# Altium PCB STM32.PcbDoc
Units mm, origin at the board's own origin, x right, y up, seen from the top; angles counter-clockwise.
Board outline 56 x 45 mm, 2 copper layers (Top Layer, Bottom Layer); 41 components, 49 nets, 211 pads, 72 vias.
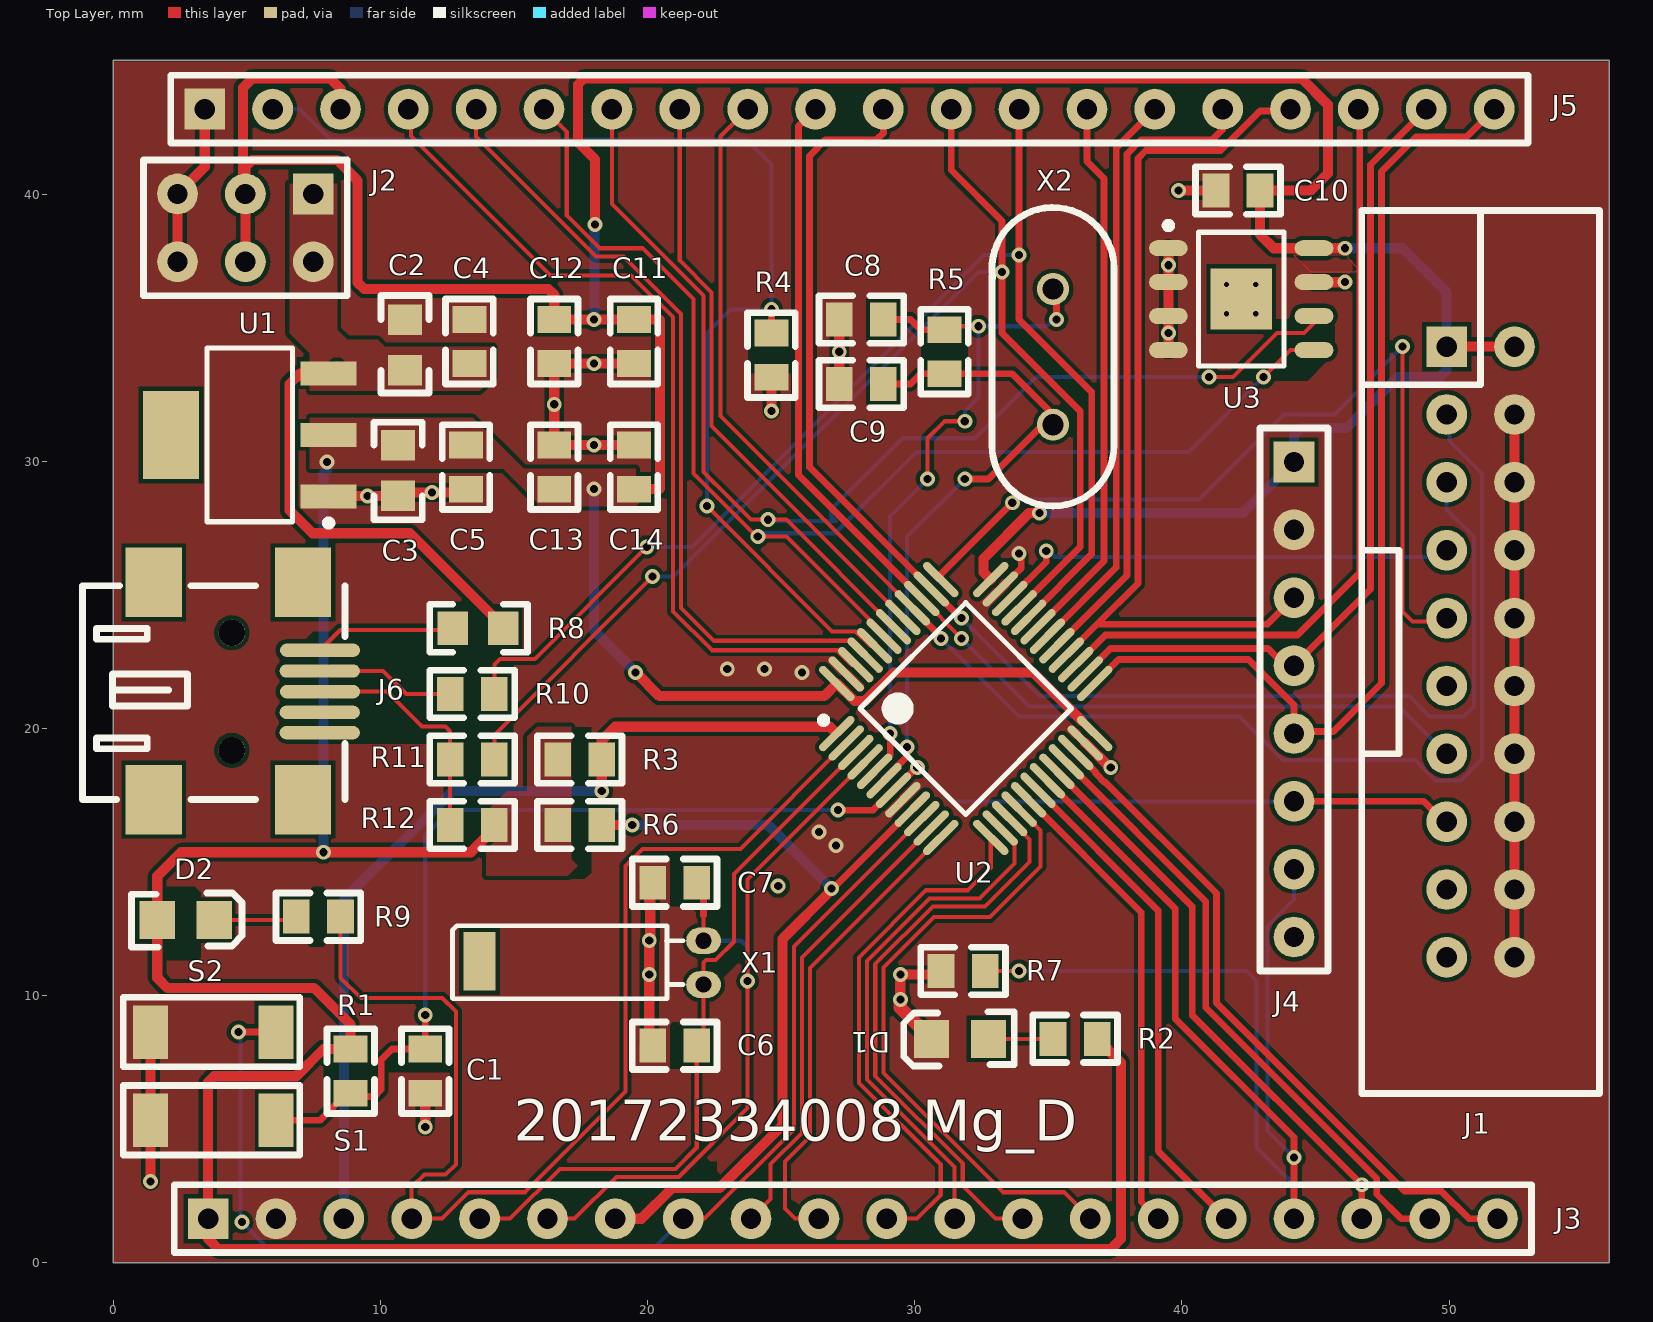
[diagram p0: Top Layer view]
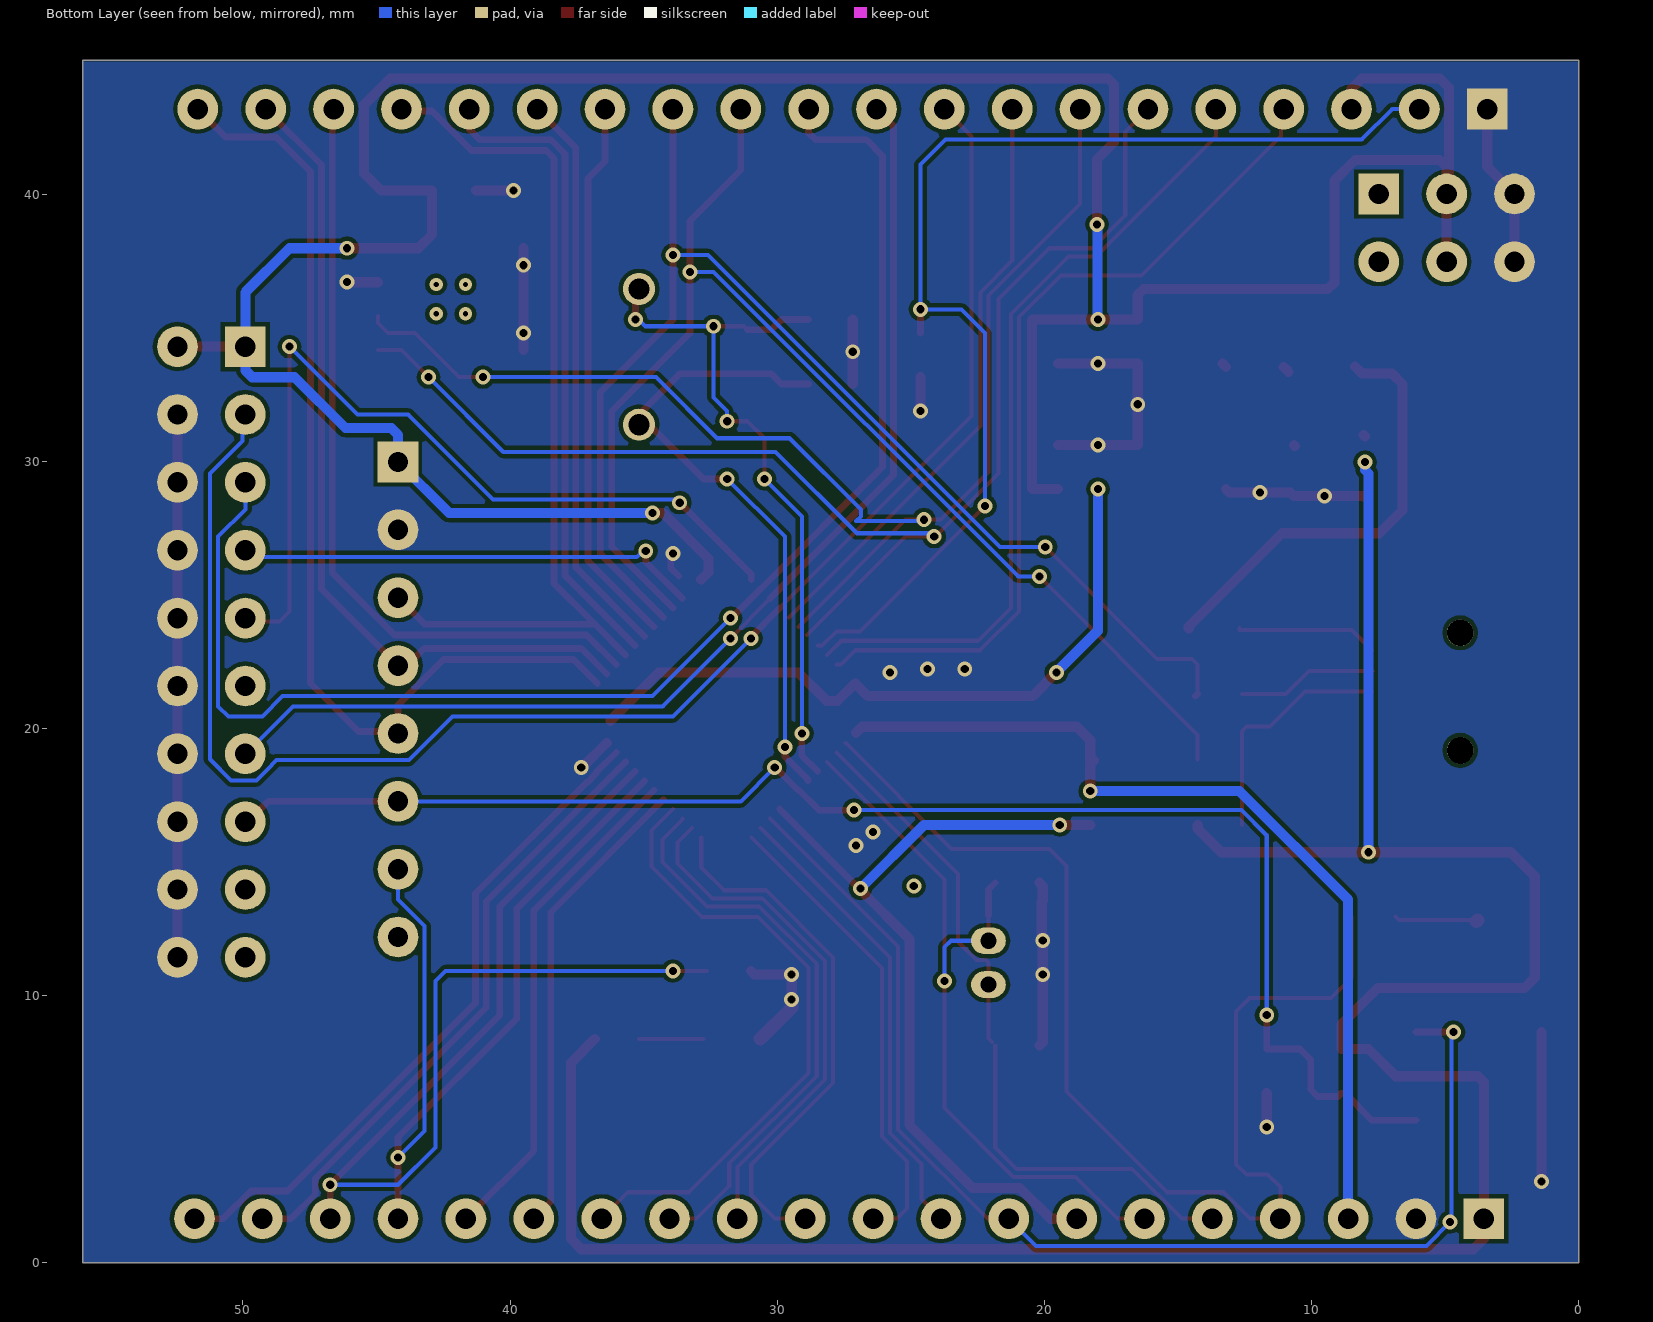
[diagram p1: Bottom Layer view, seen from below]

## Layer stack, top to bottom
Top Solder: solder mask 0.0102, Solder Resist, Dk 3.5
Top Layer: signal copper 0.0356
Dielectric 1: dielectric 0.32, FR-4, Dk 4.8
Bottom Layer: signal copper 0.0356
Bottom Solder: solder mask 0.0102, Solder Resist, Dk 3.5

## Board outline
0,0 0,45 56,45 56,0

## Design rules (kind name [scope] priority, off if disabled: settings)
Clearance [All] p1: gap=0.152 ignorepadtopadclearanceinfootprint=FALSE
PlaneConnect [All] p1: planeconnectstyle=Direct reliefexpansion=0.508 reliefentries=4 reliefconductorwidth=0.254 reliefairgap=0.254
PolygonConnect [All] p1: connectstyle=Direct reliefconductorwidth=0.254 reliefentries=4 polygonreliefangle="90 Angle" airgapwidth=0.254
RoutingVias [All] p1: holewidth=0.305 width=0.559 viastyle="Through Hole" minholewidth=0.305 minwidth=0.559 maxholewidth=0.305 maxwidth=0.559
SolderMaskExpansion [All] p1: expansion=0.102
Width PWR [InNetClass('PWR')] p1: maxlimit=0.381 minlimit=0.381 preferedwidth=0.381
Width Width_1 [All] p2: maxlimit=0.152 minlimit=0.152 preferedwidth=0.152
29 further rules are at their usual default settings.

## Classes and differential pairs
net class GND: GND
net class PWR: 3V3 5V GND VBAT VDDA

## Components (designator, comment, footprint, x,y, rotation, side; value= is the part's Value field where it differs from the comment)
C1 "104" RC0603 11.684,6.35 r90 top locked
C2 "10uf" 0805 10.922,34.351 r90 top locked
C3 "10uf" 0805 10.668,29.657 r270 top locked
C4 "104" RC0603 13.335,33.655 r90 top locked
C5 "104" RC0603 13.208,30.607 r270 top locked
C6 "15P" RC0603 20.193,8.128 r0 top locked
C7 "15P" RC0603 20.193,14.224 r0 top locked
C8 "22pF" RC0603 27.178,35.306 r0 top locked
C9 "22pF" RC0603 27.178,32.893 r0 top locked
C10 "104" RC0603 42.926,40.132 r180 top locked
C11 "104" RC0603 19.494,35.306 r270 top locked
C12 "104" RC0603 16.51,35.306 r270 top locked
C13 "104" RC0603 16.51,28.956 r90 top locked
C14 "104" RC0603 19.494,28.956 r90 top locked
D1 "LED0" LED0805#1 32.766,8.382 r0 top locked
D2 "LED0" LED0805#2 1.651,12.827 r180 top locked
J1 "Header 10X2" JTAG_20P 51.181,22.86 r270 top locked
J2 "Header 3X2" H-3X2 7.492,40.005 r180 top locked
J3 "Header 20" "H 20" 27.686,1.651 r0 top locked
J4 "TFT" H-8 44.196,21.082 r270 top locked
J5 "Header 20" "H 20" 27.559,43.18 r0 top locked
J6 "Mini-USB" mini_USB 7.744,22.926 r90 top locked
R1 "10K" RC0603 8.89,6.35 r90 top locked
R2 "510R" RC0603 36.83,8.382 r180 top locked
R3 "0R" RC0603 16.637,18.835 r0 top locked
R4 "10K" RC0603 24.638,34.798 r270 top locked
R5 "1M" RC0603 31.115,34.925 r270 top locked
R6 "0R" RC0603 16.637,16.383 r0 top locked
R7 "10K" RC0603 32.639,10.922 r180 top locked
R8 "500mA" 0805 13.655,23.749 r0 top locked
R9 "510R" RC0603 6.858,12.954 r0 top locked
R10 "22R" RC0603 12.617,21.286 r0 top locked
R11 "22R" RC0603 12.617,18.835 r0 top locked
R12 "1.5K" RC0603 12.617,16.383 r0 top locked
S1 "SW-SPST" SMT-KEY 6.097,5.334 r90 top locked
S2 "SW-SPST" SMT-KEY 6.096,8.636 r90 top locked
U1 "AMS1117-3.3" SOT223 5.117,30.988 r180 top locked
U2 "STM32F103C8T6" LQFP48 27.085,19.809 r315 top locked
U3 "AT24C04" SOIC-8 42.222,36.068 r0 top locked
X1 "32.768K" JZ32768 22.098,10.414 r90 top locked
X2 "8M" JZ49S 35.179,36.449 r90 top locked

## Footprints (in the part's own frame and the unit in brackets; to place one, negate y for a bottom-side part, rotate by r counter-clockwise, add the part's x,y. Pads: shape width x height; smd on the part's side, far side on the other; paste and mask are expansions set on the pad)
0805 [mm]
  rect 1.14x1.27 smd: 1(-0.95,0) 2(0.95,0)
  silkscreen extent -1.8,-0.9 1.85,0.9
"H 20" [mil]
  rect 60x60 hole 30: 1(-950,0)
  round 60 hole 30: 2(-850,0) 3(-750,0) 4(-650,0) 5(-550,0) 6(-450,0) 7(-350,0) 8(-250,0) 9(-150,0) 10(-50,0) 11(50,0) 12(150,0) 13(250,0) 14(350,0) 15(450,0) 16(550,0) 17(650,0) 18(750,0) 19(850,0) 20(950,0)
  silkscreen extent -1000,-50 1000,50
H-3X2 [mil]
  rect 60x60 hole 30: 1(0,0)
  round 60 hole 30: 2(0,100) 3(100,0) 4(100,100) 5(200,0) 6(200,100)
  silkscreen extent -50,-50 250,150
H-8 [mil]
  rect 60x60 hole 30: 1(-350,0)
  round 60 hole 30: 2(-250,0) 3(-150,0) 4(-50,0) 5(50,0) 6(150,0) 7(250,0) 8(350,0)
  silkscreen extent -400,-50 400,50
JTAG_20P [mil]
  rect 60x60 hole 30: 1(-450,-50)
  round 60 hole 30: 2(-450,50) 3(-350,-50) 4(-350,50) 5(-250,-50) 6(-250,50) 7(-150,-50) 8(-150,50) 9(-50,-50) 10(-50,50) 11(50,-50) 12(50,50) 13(150,-50) 14(150,50) 15(250,-50) 16(250,50) 17(350,-50) 18(350,50) 19(450,-50) 20(450,50)
  silkscreen extent -651,-175 651,175
JZ49S [mm]
  round 1.2 hole 0.8: 1(0,0) 2(-5.08,0)
  silkscreen extent -8.13,-2.29 3.05,2.29
JZ32768 [mm]
  oval 1x1.3 hole 0.6: 1(0,0) 2(1.64,0)
  rect 2.2x1.2 smd: 3(0.875,8.382)
  silkscreen extent -0.53,0.76 2.2,9.4
LED0805#1 [mil]
  rect 52x56 smd: 1(0,0) 2(-84,0)
  silkscreen extent -125,-40 38,40
LED0805#2 [mil]
  rect 52x56 smd: 1(0,0) 2(-84,0)
  Top Layer lines w20: -84,0 -86,2
  silkscreen extent -125,-40 38,40
LQFP48 [mm]
  oval 0.3x1.75 smd: 1(0,0) 2(0.5,0) 3(1,0) 4(1.5,0) 5(2,0) 6(2.5,0) 7(3,0) 8(3.5,0) 9(4,0) 10(4.5,0) 11(5,0) 12(5.5,0) 25(5.5,8.15) 26(5,8.15) 27(4.5,8.15) 28(4,8.15) 29(3.5,8.15) 30(3,8.15) 31(2.5,8.15) 32(2,8.15) 33(1.5,8.15) 34(1,8.15) 35(0.5,8.15) 36(0,8.15)
  oval 1.75x0.3 smd: 13(6.825,1.325) 14(6.825,1.825) 15(6.825,2.325) 16(6.825,2.825) 17(6.825,3.325) 18(6.825,3.825) 19(6.825,4.325) 20(6.825,4.825) 21(6.825,5.325) 22(6.825,5.825) 23(6.825,6.325) 24(6.825,6.825) 37(-1.325,6.825) 38(-1.325,6.325) 39(-1.325,5.825) 40(-1.325,5.325) 41(-1.325,4.825) 42(-1.325,4.325) 43(-1.325,3.825) 44(-1.325,3.325) 45(-1.325,2.825) 46(-1.325,2.325) 47(-1.325,1.825) 48(-1.325,1.325)
  silkscreen extent -0.82,-0.12 5.55,6.88
mini_USB [mm]
  oval 0.5x3 smd: 1(0,0) 2(-0.775,0.009) 3(-1.549,0) 4(-2.324,0.009) 5(-3.086,0.009)
  rect 2.6x2.1 smd: ""(-5.588,6.223) ""(-5.588,0.635) ""(2.54,6.223) ""(2.54,0.635)
  round 1 hole 1: ""(-3.749,3.299) ""(0.651,3.299)
  silkscreen extent -5.59,-0.94 2.41,8.89
RC0603 [mm]
  rect 1x1.27 smd: 1(0,0) 2(1.651,0)
  silkscreen extent -0.76,-0.89 2.41,0.89
SMT-KEY [mm]
  rect 2x1.3 smd paste+0 mask+0.2: 1(0,0) 2(0,4.7)
  silkscreen extent -1.3,-0.89 1.3,5.72
SOIC-8 [mm] "SOIC, 8-Leads, Body 4.90x3.90mm, Pitch 1.27mm, Thermal Pad 2.29x2.29mm, IPC Medium Density"
  oval 1.45x0.6 smd: 1(-2.725,1.905) 2(-2.725,0.635) 3(-2.725,-0.635) 4(-2.725,-1.905) 5(2.725,-1.905) 6(2.725,-0.635) 7(2.725,0.635) 8(2.725,1.905)
  rect 2.29x2.29 smd: 9(0,0)
  silkscreen extent -2.85,-2.5 1.6,2.88, body extent -2,-2.5 2,2.5, height 1.75
SOT223 [mm] "SOT223, 4-Leads, Body 6.20x7.00mm (avg), Pitch 2.30mm, IPC Medium Density"
  rect 2.1x0.9 smd: 1(-2.95,2.3) 2(-2.95,0) 3(-2.95,-2.3)
  rect 2.1x3.3 smd: 4(2.95,0)
  silkscreen extent -3.08,-3.25 1.6,3.42, body extent -1.9,-3.25 1.9,3.25, height 1.8

## Part data
C1 C4 C5 C6 C7 C8 C9 C10 C11 C12 C13 C14: library part CAP, "电容"
C2 C3: library part CAP+, "极性电容"
D1 D2: "LED"
R1 R2 R3 R4 R5 R6 R7 R8 R9 R10 R11 R12: library part RES, "电阻"
S1 S2: "开关"
U1 U2 U3: "IC"

## Via types
v1: diameter 0.559, hole 0.305, Top Layer to Bottom Layer, tented both sides, 68 vias
v2: diameter 0.5, hole 0.2, Top Layer to Bottom Layer, 4 vias

## Nets (pads, with @x,y where several pads share a name; then routed paths per layer and width w, separated by ;. In a path a pad name is that pad's centre, name@x,y a point inside that pad or via, vN(x,y) a via of type N, cw(c..) or ccw(c..) an arc to the next point about the centre after c; other vN are vias at no path point)
3V3: C3.1 C5.1 C10.1 C11.1 C12.1 C13.1 C14.1 D2.1 J1.1 J1.2 J2.3 J2.4 J3.1 J4.1 J5.3 R1.2 R2.1 R3.1 R6.1 R12.2 U1.2 U2.24 U2.36 U2.48 U3.8 | length 241.8
  Top Layer w0.381: J2.4 J2.3 ; U1.2@8.001,30.922 U1.2 ; J5.3 8.509,43.942 8.128,44.323 5.207,44.323 4.864,43.98 4.864,40.093 J2.3 ; C3.1@10.637,30.576 C3.1 ; R12.2 14.268,16.248 13.387,15.367 v1(7.874,15.367) 2.55,15.367 1.651,14.468 D2.1 1.651,10.668 2.032,10.287 7.524,10.287 8.89,8.921 R1.2 7.874,8.001 6.858,6.985 3.779,6.985 3.556,6.762 J3.1 3.556,0.898 3.946,0.508 37.338,0.508 37.719,0.889 37.719,7.493 R2.1 ; v1(18.034,38.862) 18.034,41.299 17.399,41.934 17.399,44.1 17.622,44.323 44.489,44.323 45.466,43.346 45.466,40.767 44.831,40.132 C10.1 42.926,38.481 43.434,37.973 U3.8 v1(46.101,37.973) ; C14.1 20.449,28.956 20.472,28.979 20.472,35.281 20.447,35.306 C11.1 v1(18.002,35.306) C12.1 16.51,36.226 16.287,36.449 9.398,36.449 9.144,36.703 9.144,40.513 8.382,41.275 5.207,41.275 4.952,41.02 J2.3 ; v1(19.558,22.098) 20.447,21.209 26.612,21.209 U2.48 27.09,21.688 27.747,21.031 28.156,21.031 29.216,22.091 34.445,22.091 U2.24@36.248,20.288 ; U2.36 32.575,25.845 32.575,26.352 34.29,28.067 v1(34.671,28.067) ; J1.1@49.911,34.544 49.784,34.417 J1.1 52.324,34.29 J1.2@52.451,34.417
  Bottom Layer w0.381: v1(7.874,15.367) 7.874,29.543 8.001,29.67 v1(8.001,29.972) ; v1(18.002,28.956) 18.002,23.654 v1(19.558,22.098) ; v1(18.002,35.306) 18.018,35.322 18.018,38.846 v1(18.034,38.862) ; v1(34.671,28.067) 42.291,28.067 J4.1 44.196,30.988 44.45,31.242 46.164,31.242 48.069,33.147 49.657,33.147 49.911,33.401 J1.1 49.911,36.322 48.26,37.973 v1(46.101,37.973)
5V: C2.1 C4.1 J2.1 J2.2 R8.2 U1.3 | length 17.2
  Top Layer w0.381: J2.2 J2.2@7.62,37.465 ; U1.3@8.382,33.548 8.179,33.345 8.122,33.288 U1.3 6.999,33.288 6.604,32.893 6.604,28.163 7.462,27.305 11.114,27.305 14.605,23.814 R8.2 ; C2.1@10.866,33.345 C2.1 C2.1@11.049,33.528 ; C4.1@13.208,33.528 C4.1
BOOT0: J5.2 R4.1 U2.44 | length 43.7
  Top Layer w0.152: v1(22.225,28.321) 26.912,23.634 27.79,23.634 28.328,23.097 U2.44
  Top Layer w0.254: J5.2 J5.2@6.038,43.111 ; R4.1 v1(24.638,35.687)
  Bottom Layer w0.152: J5.2 6.985,43.18 8.128,42.037 23.711,42.037 24.638,41.11 v1(24.638,35.687) 23.114,35.687 22.225,34.798 v1(22.225,28.321)
  Bottom Layer w0.254: J5.2 J5.2@6.038,43.111
GND: C1.1 C2.2 C3.2 C4.2 C5.2 C6.1 C7.1 C8.1 C9.1 C10.2 C11.2 C12.2 C13.2 C14.2 D1.2 J1.4 J1.6 J1.8 J1.10 J1.12 J1.14 J1.16 J1.18 J1.20 J2.5 J2.6 J3.2 J4.2 J5.1 R4.2 R7.2 S1.2 S2.2 U1.1 U2.8 U2.23 U2.35 U2.47 U3.1 U3.2 U3.3 U3.4 U3.7 | length 71.9
  Top Layer w0.254: U2.35@33.69,25.698 33.992,25.999 33.992,26.46 v1(33.909,26.543)
  Top Layer w0.381: S2.2 S1.2 S1.2 v1(1.397,3.048) ; J2.6 J2.5 3.429,41.022 J5.1 ; U1.1 8.076,28.697 10.658,28.697 C3.2 10.792,28.831 13.083,28.831 C5.2 ; v1(11.684,5.08) C1.1 ; C14.2 C13.2 C12.2 C11.2 ; C6.1 20.066,8.255 v1(20.066,12.065) 20.104,12.103 20.104,13.534 20.066,13.572 20.066,14.097 C7.1 ; v1(24.638,31.877) R4.2 ; C9.1 C8.1 ; v1(29.464,9.855) v1(29.464,10.795) 30.861,10.795 R7.2 ; U2.23 36.394,19.455 37.307,18.542 v1(37.338,18.542) ; U3.4 U3.3 ; v1(39.497,34.798) U3.3 ; v1(39.497,37.338) U3.1 U3.2 U3.3 ; v1(39.878,40.132) C10.2 ; U3.7 v1(46.101,36.703) ; J1.20 J1.18 J1.16 J1.14 J1.12 J1.10 J1.8 J1.6 J1.4
  Top Layer w0.508: v1(29.464,9.855) 29.464,9.55 D1.2
  other v1: 20.066,10.795 27.051,15.621 26.416,16.129 25.781,22.098 22.987,22.225 24.384,22.225 9.525,28.702 11.938,28.831 18.002,30.607 16.51,32.131 18.002,33.655 27.178,34.099
NetC8_2: C8.2 R5.1 U2.5 X2.1 | length 26.7
  Top Layer w0.152: v1(30.48,29.337) 30.48,30.861 31.115,31.496 v1(31.877,31.496) ; R5.1 31.242,35.052 v1(32.385,35.052)
  Top Layer w0.254: U2.5 28.5,18.407 29.088,18.995 29.088,19.807 v1(29.083,19.812) ; C8.2 29.845,35.306 30.226,34.925 R5.1 ; X2.1 35.306,36.322 v1(35.306,35.306)
  Bottom Layer w0.152: v1(29.083,19.812) 29.083,27.94 v1(30.48,29.337) ; v1(31.877,31.496) 31.877,31.877 32.385,32.385 v1(32.385,35.052) 34.942,35.052 35.196,35.306 v1(35.306,35.306)
NetC9_2: C9.2 R5.2 U2.6 X2.2 | length 24
  Top Layer w0.254: C9.2 29.845,32.893 30.226,33.274 R5.2 33.655,33.274 35.179,31.75 32.766,29.337 v1(31.877,29.337) ; U2.6 28.853,18.086 29.718,18.951 v1(29.718,19.304)
  Bottom Layer w0.152: v1(29.718,19.304) 29.718,27.178 v1(31.877,29.337)
NetD1_1: D1.1 R2.2 | length 2.4
  Top Layer w0.152: D1.1 R2.2
NetD2_2: D2.2 R9.1 | length 3.1
  Top Layer w0.152: D2.2 6.731,12.827 R9.1
NetJ6_1: J6.1 R8.1 | length 5.3
  Top Layer w0.152: J6.1 8.501,23.684 12.705,23.684 R8.1
NetJ6_2: J6.2 R10.1 | length 5.2
  Top Layer w0.152: J6.2 10.106,22.152 10.972,21.286 R10.1
NetJ6_3: J6.3 R11.1 R12.1 | length 9
  Top Layer w0.152: J6.3 10.246,21.377 11.557,20.066 12.446,20.066 12.617,19.895 R11.1 R12.1
NRST: C1.2 J1.15 J4.6 R1.1 S1.1 U2.7 | length 55.6
  Top Layer w0.254: S1.1 7.739,5.334 8.755,6.35 R1.1 9.017,6.223 9.779,6.223 10.033,6.477 10.033,7.598 10.436,8.001 C1.2 v1(11.684,9.271) ; v1(27.127,16.942) 28.449,16.942 29.194,17.687 U2.7 29.219,17.687 30.074,18.542 v1(30.099,18.542) ; J4.6 49.057,17.272 49.819,16.51 J1.15
  Bottom Layer w0.152: v1(11.684,9.271) 11.684,16.002 12.624,16.942 v1(27.127,16.942) ; v1(30.099,18.542) 31.369,17.272 J4.6
PA0: J3.8 S2.1 U2.10 | length 45
  Top Layer w0.152: J3.8 22.14,1.651 25.476,4.987 25.476,11.835 U2.10
  Top Layer w0.254: v1(4.699,8.636) S2.1
  Bottom Layer w0.152: v1(4.699,8.636) 4.763,8.572 4.763,1.587 v1(4.826,1.524) 4.826,1.52 5.711,0.635 20.32,0.635 J3.8
PA1: J3.9 U2.11 | length 17.4
  Top Layer w0.152: J3.9 24.613,2.388 24.613,3.692 25.781,4.861 25.781,11.433 U2.11
PA2: J3.10 U2.12 | length 17.7
  Top Layer w0.152: J3.10 25.527,1.651 25.146,2.032 25.146,3.795 26.086,4.734 26.086,11.031 U2.12
PA3: J3.11 U2.13 | length 20
  Top Layer w0.152: J3.11 30.095,1.651 30.976,2.532 30.976,3.671 27.915,6.733 27.915,11.428 30.431,13.945 32.003,13.945 32.848,14.79 U2.13
PA4: J3.12 U2.14 | length 19.6
  Top Layer w0.152: J3.12 31.496,3.583 28.219,6.859 28.219,11.302 30.558,13.64 32.436,13.64 33.74,14.944 33.74,15.735 U2.14
PA5: J3.13 U2.15 | length 21.7
  Top Layer w0.152: U2.15 33.555,16.587 34.299,15.843 34.299,15.001 32.634,13.335 30.684,13.335 28.524,11.175 28.524,6.986 31.801,3.709 31.801,2.87 33.02,1.651 J3.13
PA6: J3.14 U2.16 | length 23.9
  Top Layer w0.152: U2.16 34.706,16.183 34.706,14.832 32.814,12.941 30.721,12.941 28.829,11.049 28.829,7.112 33.299,2.642 35.585,2.642 J3.14
PA7: J3.15 U2.17 | length 17.7
  Top Layer w0.254: U2.17 38.481,13.115 38.481,2.286 J3.15
PA8: J5.16 U2.29 | length 24.2
  Top Layer w0.254: U2.29 37.948,25.721 37.948,41.504 38.481,42.037 41.148,42.037 41.529,42.418 J5.16
PA9: J5.15 U2.30 | length 21.4
  Top Layer w0.254: U2.30 37.541,26.022 37.541,41.732 J5.15
PA10: J5.14 U2.31 | length 20.7
  Top Layer w0.254: U2.31 37.084,26.272 37.084,40.58 36.449,41.215 J5.14
PA11: J5.13 R10.2 U2.32 | length 48.3
  Top Layer w0.152: R10.2 14.268,22.396 14.478,22.606 15.782,22.606 19.933,26.757 v1@19.933,26.797
  Top Layer w0.254: R10.2 R10.2@14.345,21.209 ; J5.13 v1(33.909,37.719) 33.909,35.306 36.627,32.588 36.627,26.522 U2.32
  Bottom Layer w0.152: v1(19.973,26.797) 21.667,26.797 32.589,37.719 v1(33.909,37.719)
PA12: J5.12 R11.2 U2.33 | length 48.7
  Top Layer w0.152: R11.2 14.268,19.756 v1(20.193,25.681)
  Top Layer w0.254: J5.12 31.369,40.894 33.274,38.989 v1(33.274,37.084) 33.274,34.798 36.195,31.877 36.195,26.797 U2.33
  Bottom Layer w0.152: v1(20.193,25.681) 20.982,25.681 32.385,37.084 v1(33.274,37.084)
PB0: J3.16 U2.18 | length 19
  Top Layer w0.254: U2.18 39.116,13.188 39.116,4.191 J3.16
PB1: J3.17 J4.7 U2.19 | length 31.9
  Top Layer w0.254: U2.19 39.751,13.26 39.751,9.144 44.196,4.699 v1(44.196,3.937) J3.17
  Bottom Layer w0.152: v1(44.196,3.937) 43.205,4.928 43.205,12.602 44.196,13.593 J4.7
  Bottom Layer w0.254: J4.7@44.12,14.656 J4.7
PB2: J3.18 R7.1 U2.20 | length 42.5
  Top Layer w0.152: R7.1 v1(33.909,10.922)
  Top Layer w0.254: U2.20 40.386,13.332 40.386,9.271 v1(46.736,2.921) J3.18
  Bottom Layer w0.152: v1(33.909,10.922) 42.418,10.922 42.799,10.541 42.799,4.318 44.196,2.921 v1(46.736,2.921)
PB5: J5.8 U2.41 | length 22.5
  Top Layer w0.152: J5.8 21.209,37.515 22.403,36.321 22.403,31.315 U2.41
PB6: J5.7 U2.42 U3.6 | length 48.8
  Top Layer w0.152: J5.7 18.669,39.624 22.098,36.195 22.098,29.591 22.555,29.134 22.562,29.134 23.882,27.813 v1(24.511,27.813) 25.198,27.813 U2.42 ; v1(41.021,33.147) 41.914,33.147 43.565,34.798 44.577,34.798 44.947,35.168 U3.6
  Bottom Layer w0.152: v1(24.511,27.813) 24.562,27.762 27.052,27.762 26.873,27.941 26.873,28.193 29.541,30.861 32.258,30.861 34.544,33.147 v1(41.021,33.147)
PB7: J5.6 U2.43 U3.5 | length 50.3
  Top Layer w0.152: J5.6 16.98,42.329 16.98,39.198 18.205,37.973 19.812,37.973 21.717,36.068 21.717,29.541 22.429,28.829 22.435,28.829 24.086,27.178 v1(24.13,27.178) 25.209,27.178 U2.43@28.895,23.492 ; v1(43.053,33.147) 44.069,34.163 U3.5
  Bottom Layer w0.152: v1(24.13,27.178) 24.257,27.305 27.026,27.305 30.074,30.353 40.259,30.353 v1(43.053,33.147)
PB8: J5.5 U2.45 | length 30.1
  Top Layer w0.152: J5.5 13.589,42.158 18.078,37.668 19.109,37.668 21.26,35.517 21.26,24.51 22.489,23.281 27.608,23.281 U2.45
PB9: J5.4 U2.46 | length 32.3
  Top Layer w0.152: J5.4 11.151,43.078 11.151,42.178 16.372,36.957 19.389,36.957 20.955,35.391 20.955,24.384 22.412,22.927 27.083,22.927 27.621,22.39 U2.46
PB10: J3.19 U2.21 | length 23.4
  Top Layer w0.254: U2.21 40.894,13.531 40.894,9.553 47.295,3.152 47.295,2.565 48.209,1.651 J3.19
PB11: J3.20 U2.22 | length 25.4
  Top Layer w0.254: U2.22 36.779,18.353 36.779,18.311 37.107,17.983 37.149,17.983 41.3,13.832 41.3,9.722 48.33,2.692 49.707,2.692 50.749,1.651 J3.20
PB12: J4.5 J5.20 U2.25 | length 38
  Top Layer w0.254: U2.25 37.636,22.581 42.495,22.581 44.196,20.879 J4.5 44.272,19.888 45.669,19.888 47.473,21.692 47.473,40.843 48.768,42.139 50.648,42.139 J5.20
PB13: J4.4 J5.19 U2.26 | length 31.3
  Top Layer w0.254: U2.26 37.335,22.987 43.217,22.987 43.852,22.352 J4.4 47.066,25.222 47.066,41.097 J5.19
PB14: J5.18 U2.27 | length 29.4
  Top Layer w0.254: U2.27 37.136,23.495 44.323,23.495 46.66,25.832 46.66,43.129 J5.18
PB15: J4.3 J5.17 U2.28 | length 34
  Top Layer w0.254: U2.28 36.835,23.901 ; J5.17 43.993,43.104 42.926,43.104 41.452,41.631 38.649,41.631 38.354,41.335 38.354,25.42 36.835,23.901 ; J4.3 43.205,23.901 36.835,23.901
PC13: J3.4 R9.2 U2.2 | length 44.6
  Top Layer w0.152: R9.2 8.509,10.668 9.271,9.906 12.319,9.906 12.827,9.398 12.827,3.683 12.446,3.302 11.646,3.302 11.176,2.832 J3.4 12.315,1.651 13.306,2.642 15.415,2.642 19.177,6.404 19.177,14.859 19.812,15.494 23.478,15.494 U2.2
PC14: C6.2 J3.5 U2.3 X1.1 | length 26.5
  Top Layer w0.152: J3.5 14.855,1.651 16.722,3.518 21.044,3.518 21.844,4.318 C6.2 ; C6.2@21.963,8.263 22.098,8.398 X1.1 22.098,11.236 22.187,11.325 22.55,11.325 23.241,12.017 23.241,14.55 U2.3
PC15: C7.2 J3.6 U2.4 X1.2 | length 29.5
  Top Layer w0.152: J3.6 17.272,1.651 18.835,3.214 21.171,3.214 23.749,5.792 v1(23.749,10.541) 23.749,14.351 U2.4 ; X1.2 22.098,13.012
  Top Layer w0.254: C7.2 22.098,13.97 22.098,13.012 ; X1.2 X1.2@22.241,11.911
  Bottom Layer w0.152: X1.2 23.506,12.054 23.749,11.811 v1(23.749,10.541)
TCLK: J1.9 U2.37 | length 32.8
  Top Layer w0.152: v1(48.26,34.29) 48.26,24.384 48.641,24.003 49.784,24.003 J1.9
  Top Layer w0.254: U2.37 30.975,25.768 v1(33.655,28.448)
  Bottom Layer w0.152: v1(33.655,28.448) 33.782,28.575 40.64,28.575 43.815,31.75 45.72,31.75 v1(48.26,34.29)
TDI/PA15: J1.5 J5.11 U2.38 | length 53.4
  Top Layer w0.254: J5.11 28.829,42.291 28.575,42.037 26.67,42.037 26.06,41.427 26.06,29.779 U2.38 30.633,25.218 31.722,24.13 v1(31.75,24.13)
  Bottom Layer w0.152: v1(31.75,24.13) 34.671,21.209 48.514,21.209 49.276,20.447 50.546,20.447 50.927,20.828 50.927,27.178 49.911,28.194 J1.5
TDO/PB3: J1.13 J5.10 U2.39 | length 42.6
  Top Layer w0.152: U2.39 v1@31.757,23.375
  Top Layer w0.254: J5.10 25.654,42.545 25.654,29.478 U2.39 ; v1@31.722,23.368 v1(31.75,23.368)
  Bottom Layer w0.152: v1(31.75,23.368) 34.29,20.828 48.133,20.828 J1.13
  Bottom Layer w0.254: v1@31.775,23.393 v1(31.75,23.368) v1@31.778,23.368
TMS: J1.7 U2.34 | length 17.5
  Top Layer w0.254: U2.34 34.925,26.234 v1(34.925,26.643)
  Bottom Layer w0.152: v1(34.925,26.643) 35.035,26.643 35.262,26.416 49.657,26.416 J1.7
TRST/PB4: J1.3 J5.9 U2.40 | length 59.9
  Top Layer w0.152: J5.9 22.733,42.164 22.733,31.692 U2.40
  Top Layer w0.254: U2.40 29.914,24.499 30.988,23.424 v1(30.988,23.368)
  Bottom Layer w0.152: v1(30.988,23.368) 33.909,20.447 42.16,20.447 43.786,18.821 48.747,18.821 48.92,18.648 48.92,18.64 49.501,18.059 50.444,18.059 51.232,18.847 51.232,29.545 50.018,30.759 50.018,31.643 J1.3
  Bottom Layer w0.254: v1@30.988,23.34 v1(30.988,23.368)
VBAT: J3.3 R3.2 U2.1 | length 34.3
  Top Layer w0.381: R3.2@18.161,18.796 18.288,18.669 v1(18.288,17.653) ; R3.2@18.288,18.796 R3.2 18.288,19.558 18.796,20.066 26.828,20.066 U2.1@27.057,19.837
  Bottom Layer w0.381: J3.3 8.636,13.589 12.7,17.653 v1(18.288,17.653)
VDDA: J3.7 R6.2 U2.9 | length 31.2
  Top Layer w0.254: v1@26.945,14.011 U2.9
  Top Layer w0.381: R6.2 v1(19.431,16.383) ; J3.7 19.773,1.651 20.917,2.794 22.691,2.794 25.057,5.16 25.057,12.124 26.888,13.955 v1(26.888,14.011) v1@26.945,14.011
  Bottom Layer w0.381: v1(19.431,16.383) 24.517,16.383 v1(26.888,14.011)
pads on no net: J1.11 J1.17 J1.19 J4.8 J6. J6.4 J6.5 U1.4 U3.9 X1.3
copper on no net:
  other v1: 24.892,14.097
  other v2: 41.672,35.518 42.772,35.518 41.672,36.618 42.772,36.618

## Polygon pours and split planes (outlines as drawn)
no net on Top Layer (solid, pour order 40): 44.069,36.449
no net on Top Layer (solid, pour order 38): 44.196,37.719 44.831,37.084 46.482,37.084 46.609,37.211 46.228,37.592 46.228,37.719
no net on Top Layer (solid, pour order 36): 44.958,32.766
GND on Top Layer (solid, pour order 34): 0,44.958 0,0 56.007,0 56.007,44.958
no net on Top Layer (solid, pour order 28): 7.62,35.179
5V on Top Layer (solid, pour order 26): 6.604,40.386 8.382,40.386 8.382,34.925 8.763,34.544 9.906,34.544 10.16,34.29 14.224,34.29 14.224,33.147 13.716,32.639 7.366,32.639 7.366,34.036 6.604,34.798
3V3 on Top Layer (solid, pour order 24): 7.366,31.623 7.366,29.718 14.605,29.718 15.875,28.448 15.875,28.321 19.558,28.321 19.685,28.448 19.558,28.575 19.558,29.718 15.367,29.718 13.462,31.623
3V3 on Top Layer "Top Layer-3V3" (solid, remove dead copper, pour order 20): 13.97,16.891 13.97,14.478 17.018,14.478 17.399,14.859 17.145,15.113 17.145,20.066 15.875,20.066 15.494,19.685 15.494,17.653 14.732,17.653
no net on Top Layer "Top Layer-No Net" (solid, pour order 14): 17.399,28.829
no net on Top Layer "Top Layer-No Net 1" (solid, pour order 10): 18.796,27.559
no net on Top Layer "Top Layer-No Net 2" (solid, pour order 8): 19.812,29.21
GND on Bottom Layer (solid, pour order 32): 0,44.958 0,0 56.007,0 56.007,44.958

## Other copper
Top Layer:
  pour cut-out: 45.72,34.036 45.72,35.052 45.466,35.306 43.434,35.306 43.434,34.417 42.037,33.02 44.704,33.02
  pour cut-out: 23.749,33.401 23.876,33.528 25.527,33.528 25.527,34.29 25.654,34.417 23.749,34.417
  pour cut-out: 23.876,34.036
  pour cut-out: 25.146,33.909
  pour cut-out: 23.749,33.401 23.876,33.274 25.527,33.274 25.527,34.163 23.749,34.163 23.749,33.528 25.654,33.528 25.654,34.29 25.527,34.417 23.749,34.417
  pour cut-out: 30.226,34.417 30.226,33.909 30.353,33.782 32.004,33.782 32.004,34.544 31.877,34.417
  pour cut-out: 25.146,2.54 25.146,2.032 25.527,1.651 25.908,2.032
  pour cut-out: 21.463,3.683 21.59,3.556 21.59,2.794 22.733,2.794 22.987,3.048 22.606,3.429 22.606,3.81 22.352,3.81 22.098,4.064 21.717,3.683
  pour cut-out: 16.383,3.556 16.002,3.175 16.002,1.905 18.415,1.905 19.939,3.429
  pour cut-out: 22.479,11.938 22.479,10.668 22.606,10.541 22.733,10.541 23.622,11.43 23.114,11.938
  pour cut-out: 19.939,15.24 20.066,15.113 23.495,15.113 23.622,15.24 23.495,15.367 20.066,15.367
  pour cut-out: 22.352,15.24
  pour cut-out: 23.622,15.24 23.495,15.113 21.209,15.113 21.209,13.716 23.368,11.557 23.622,11.557
  pour cut-out: 21.336,15.113 20.828,15.113 20.828,13.335 21.336,13.335
  pour cut-out: 21.209,9.017 20.955,9.017 20.828,8.89 20.828,7.239 21.336,7.239
  pour cut-out: 17.145,14.351 17.653,14.351 17.907,14.605 17.526,14.605
  pour cut-out: 10.414,7.874 10.287,7.747 10.287,7.112 12.573,7.112 12.7,7.239 12.7,7.493
  pour cut-out: 7.874,7.62 7.874,6.858 8.001,6.731 8.128,6.858 9.906,6.858 9.906,7.493 9.779,7.62
  pour cut-out: 10.033,13.208
  pour cut-out: 7.493,14.097 7.239,13.843 7.239,11.938 7.366,11.811 7.874,11.811 8.001,11.938 8.001,13.97 7.874,14.097
  pour cut-out: 1.651,13.97 1.651,11.43 1.778,11.303 3.175,11.303 3.302,11.43 3.302,13.843 3.048,14.097 1.778,14.097
  pour cut-out: 12.827,23.622 7.493,23.622 7.112,23.241 9.017,21.336 9.017,19.431 12.065,19.431 12.319,19.685
  pour cut-out: 16.891,20.066 16.891,14.478 17.907,14.605 17.907,20.066
  pour cut-out: 12.446,24.765 12.446,16.002 12.7,15.748 12.827,15.875 14.097,15.875 14.986,16.764 14.986,24.511 14.859,24.638

## Silkscreen, mask and mechanical layers (free items; w line width, h text height)
Top Overlay:
  text "20172334008 Mg_D" at 14.986,4.572 h1.52
Mechanical 1:
  the board outline again, w0.254